# EAGLE board USB_Boost (EAGLE 6.5.0)
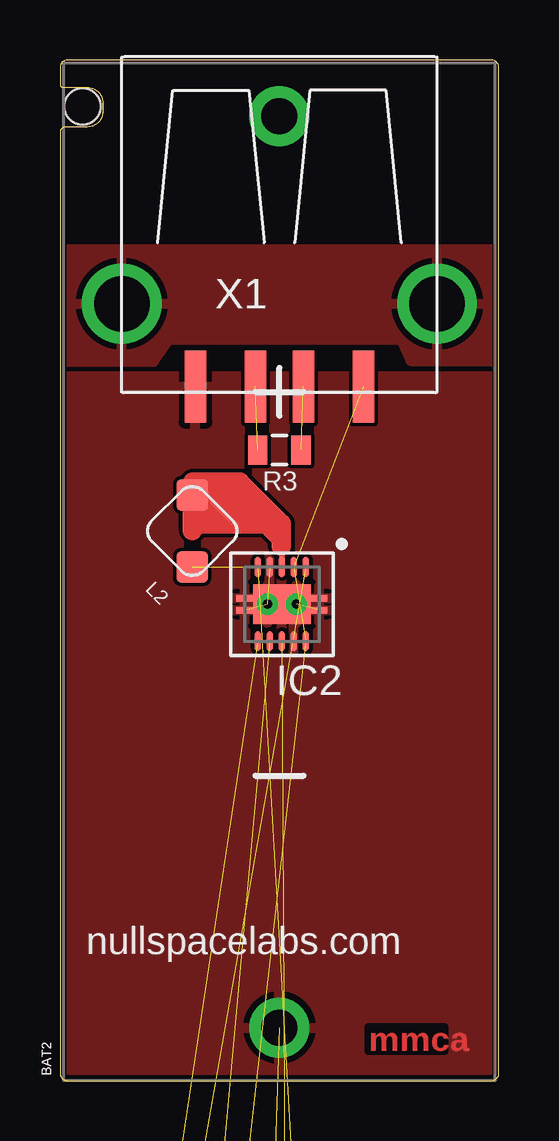
[diagram p0: board, top side]
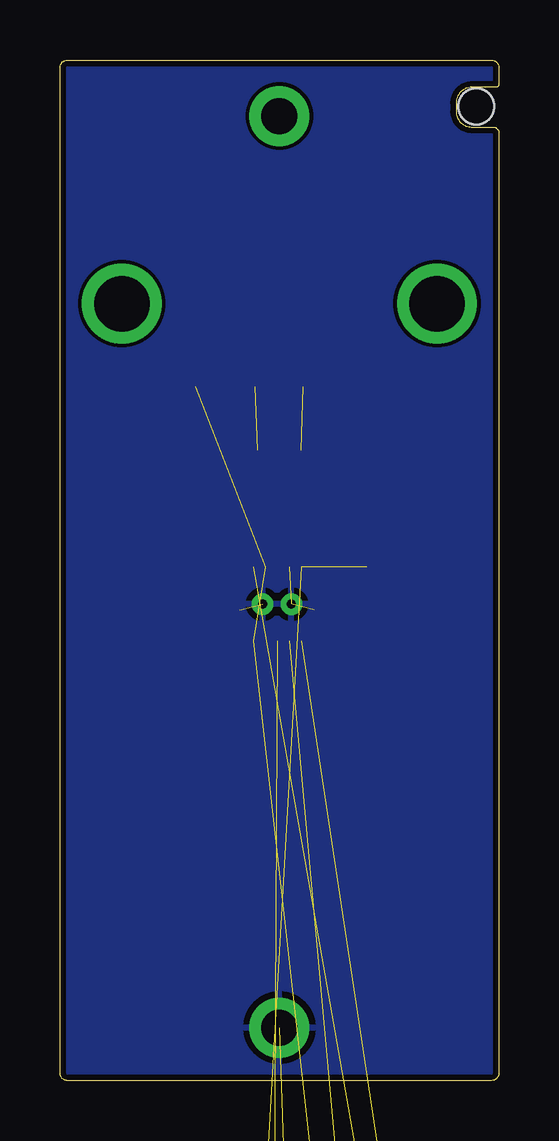
[diagram p1: board, bottom side, seen from below]

Size 18.29 x 42.55 mm. Coordinates in mm from the lower left corner, seen from the top.
Outline: 17.97,0 arc90 18.29,0.32 18.29,42.23 arc90 17.97,42.55 0.32,42.55 arc90 0,42.23 0,41.53 arc90 0.13,41.4 1.14,41.4 arc-90 1.78,40.77 1.78,40.39 arc-90 1.14,39.75 0.25,39.75 arc90 0,39.5 0,0.32 arc90 0.32,0 17.97,0
Copper layers (1*16): Top 0.035mm / dielectric 1.5mm / Bottom 0.035mm
Design rules "ITead_rule *": minimum track width 6mil, minimum drill 12mil, track to track 6mil, track to pad 6mil, pad to pad 6mil, via to via 6mil, smd to smd 6mil, copper to edge 10mil, drill to drill 10mil, minimum pad ring 10mil, minimum via ring 6mil, stop-mask expansion 2mil, vias tented up to drill 100mil, thermal gap 10mil
Net classes: 0 default: width 0.203 mm; 2 power: width 0.356 mm, drill 0.254 mm, clearance 0.203 mm

## Footprints (pad centres in the part's own frame; a part is rotated, then mirrored left to right if it is on the bottom)
BATTERY_CR123A = drill 1.5 pad 2.5: + 19,0; - -19,0 | hole 1.5: 19.4,8.2; 19.4,8.2
SPARKFUN_0603-CAP = smd 1.1 x 1: 1 -0.85,0; 2 0.85,0
QFN-10 = smd 0.28 x 0.85: 1 -1,-1.545; 2 -0.5,-1.545; 3 0,-1.545; 4 0.5,-1.545; 5 1,-1.545; 6 1,1.545; 7 0.5,1.545; 8 0,1.545; 9 -0.5,1.545; 10 -1,1.545 | smd 2.4 x 1.65: P0 0,0 | smd 0.7 x 0.28: P1 -1.55,-0.25; P2 1.55,-0.25; P3 1.55,0.25; P4 -1.55,0.25 | drill 0.381: V0 -0.6,0; V1 0.6,0
SJ_3 = smd 0.635 x 1.27: 1 -0.889,0; 2 0,0; 3 0.965,0
CDRH2D18 = smd 1.3 x 1.3 rotated 225: P$1 -1.061,1.061 | smd 1.3 x 1.3 rotated 315: P$2 1.061,-1.061
0805 = smd 0.8 x 1.2: 1 -0.9,0; 2 0.9,0
RLC_0603 = smd 1 x 1.1: 1 -0.85,0; 2 0.85,0
SWITCH-SPST-SMD-A = smd 0.7 x 1.5: 1 -2.25,-1.75; 2 -0.75,-1.75; 3 2.25,-1.75 | smd 1 x 0.6: GND1 -3.65,1; GND3 3.65,1 | smd 1 x 0.8: GND2 -3.65,-1.1; GND4 3.65,-1.1 | hole 0.9: -1.5,0; 1.5,0
KSUBX-SMT-AS1N = smd 3 x 0.9: D+ 3.45,-1; D- 3.45,1; GND 3.45,-3.5; VBUS 3.45,3.5 | drill 2.311: P$5 0,-6.566; P$6 0,6.566

## Placement (x,y rotation side)
BAT2  [BATTERY_CR123A]  9.14,21.21 90 top
C62  10uF  [SPARKFUN_0603-CAP]  0.63,-20.98 0 top  (outside the outline)
C63  0.1uF  [SPARKFUN_0603-CAP]  3.66,-20.98 0 top  (outside the outline)
C64  10uF  [SPARKFUN_0603-CAP]  6.68,-20.98 0 top  (outside the outline)
IC2  [QFN-10]  9.25,19.86 180 top
JP3  JUMPER-3SMD  [SJ_3]  9.42,-16.08 0 top  (outside the outline)
L2  CDRH2D18/HPNP-2R2NC  [CDRH2D18]  5.51,22.91 135 top
R3  100R  [0805]  9.14,26.29 180 top
R55  1.5M  [RLC_0603]  0.81,-23.65 0 top  (outside the outline)
R60  150K 1%  [RLC_0603]  4.09,-23.65 0 top  (outside the outline)
S1  [SWITCH-SPST-SMD-A]  3.38,-17.12 0 top  (outside the outline)
X1  USBKUSBX-SMT-AS1N  [KSUBX-SMT-AS1N]  9.14,32.38 270 top

## Library data of the parts
BAT2 = tvbgone-adj
C62 C64 JP3 L2 S1 = STM32-PROX; OC_NEWARK: unknown; PARTNO: *
C63 = STM32-PROX; MPN: 02016D104KAT2A; OC_NEWARK: 85K9474; PARTNO: 02016D104KAT2A
IC2 = STM32-PROX; OC_NEWARK: unknown; PARTNO: TPS61202DRCT
R3 = SparkFun
R55 = STM32-PROX; OC_NEWARK: unknown; PARTNO: *; TOLERANCE: 5%
R60 = STM32-PROX; OC_NEWARK: unknown; PARTNO: *; TOLERANCE: 1%
X1 = USB_Boost

## Nets
D+: R3.2 X1.D+
D-: R3.1 X1.D-
GND: BAT2.- C62.2 C63.2 C64.2 IC2.4 IC2.9 IC2.P0 IC2.P1 IC2.P2 IC2.P3 IC2.P4 IC2.V0 IC2.V1 JP3.1 R60.1 S1.1 X1.GND
GNDUSB: X1.P$5 X1.P$6
N$66: C63.1 IC2.1
N$67: IC2.7 R55.1 R60.2
N$68: IC2.3 L2.P$2
ONOFF: IC2.6 S1.2
PS: IC2.8 JP3.2
VBAT+ [power]: C62.1 IC2.5 JP3.3 L2.P$1 R55.2 S1.3
VCC: BAT2.+
VOUT: C64.1 IC2.2 IC2.10 X1.VBUS

## Tracks (layer width: path | path; a pad name or v marks a point on that pad's centre or on a via)
D+  (1 unrouted)
D-  (1 unrouted)
GND  (9 unrouted)
  pour Top: -0.25,29.36 18.16,29.36 18.29,0 -0.13,0
  pour Bottom: -0.41,43.13 18.49,43.13 18.49,-0.71 -0.41,-0.71
GNDUSB
  pour Top: 4.52,30.86 14.2,30.89 14.61,30 18.31,30 18.24,34.65 -0.3,34.65 -0.3,29.97 3.91,29.97
N$66  (1 unrouted)
N$67  (2 unrouted)
N$68
  Top 0.254: 5.51,22.94 8.69,22.94 9.25,22.38 IC2.3
  Top 0.813: 5.51,22.94 L2.P$2 | L2.P$2 5.51,24.92 5.54,24.94 7.49,24.94 9.22,23.22 9.22,23.11 | 9.22,23.11 9.22,22.68 | 9.22,22.68 9.14,22.68 7.42,24.41 6.12,24.41 6.12,23.5 5.99,23.37 7.87,23.37 8,23.24 7.42,23.24 6.73,23.93 7.98,23.93 9.22,22.68 | 9.22,22.68 9.22,22.28 9.22,23.11 | 9.22,23.11 8.87,23.29 6.63,23.29 L2.P$2
ONOFF  (1 unrouted)
PS  (1 unrouted)
VBAT+  (5 unrouted)
VOUT  (3 unrouted)

## Text on the board
Top: mmca
tPlace: nullspacelabs.com